# Altium PCB PCB1.PcbDoc (part 1 of 2)
Units mm, origin at the board's own origin, x right, y up, seen from the top; angles counter-clockwise.
Board outline 123 x 45 mm, 2 copper layers (Top Layer, Bottom Layer); 147 components, 132 nets, 546 pads, 235 vias.
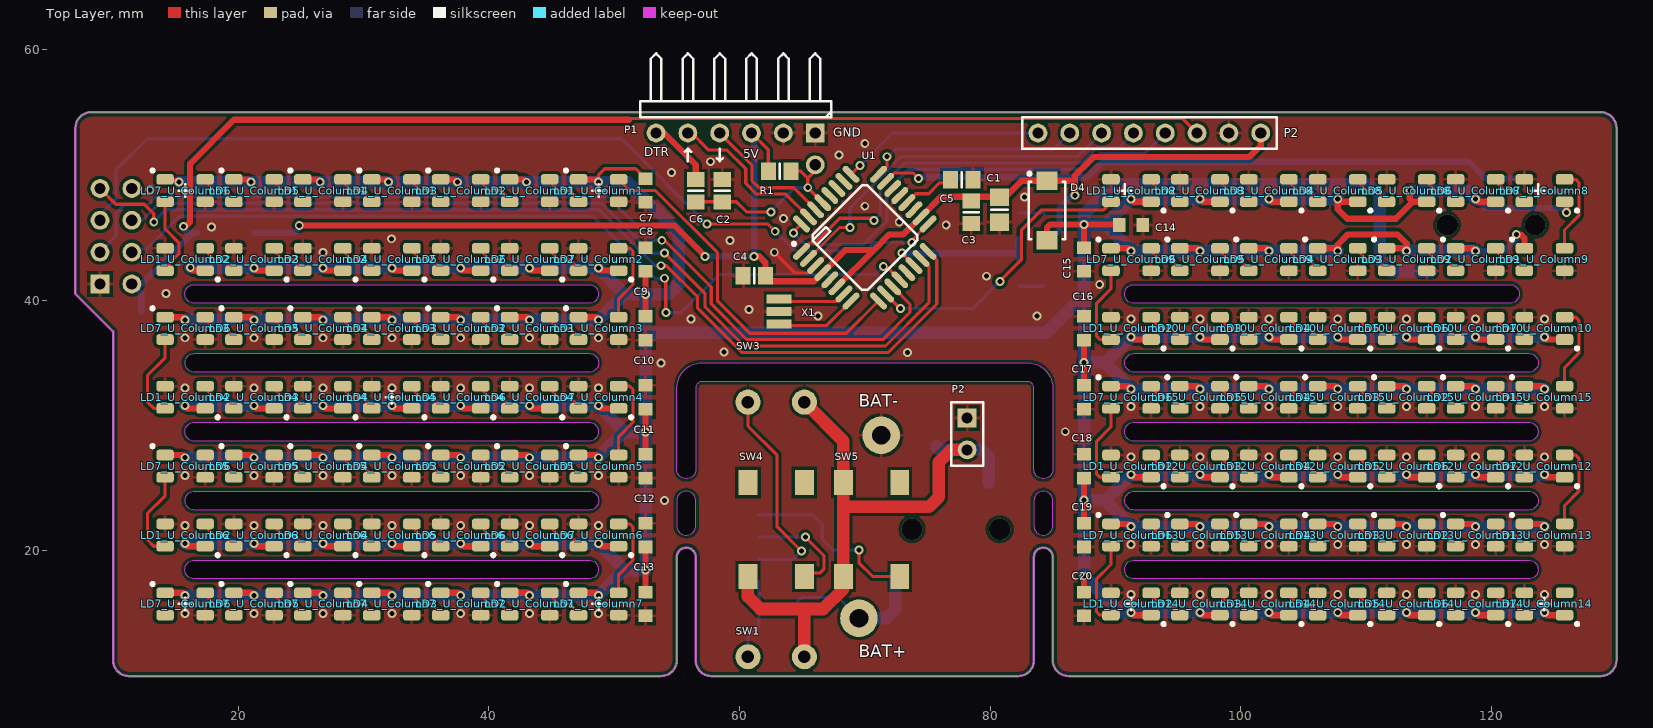
[diagram p0: Top Layer view]
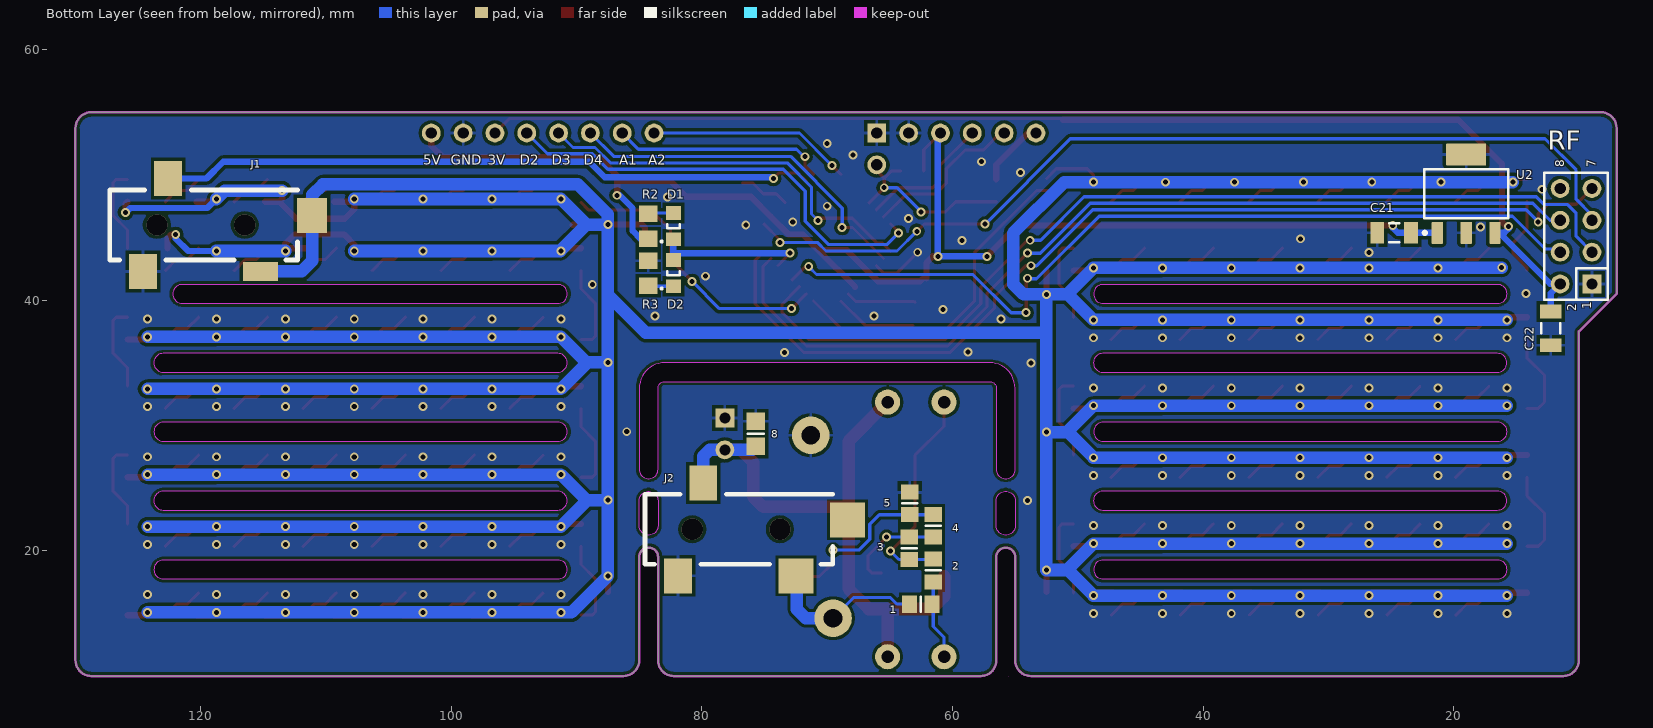
[diagram p1: Bottom Layer view, seen from below]
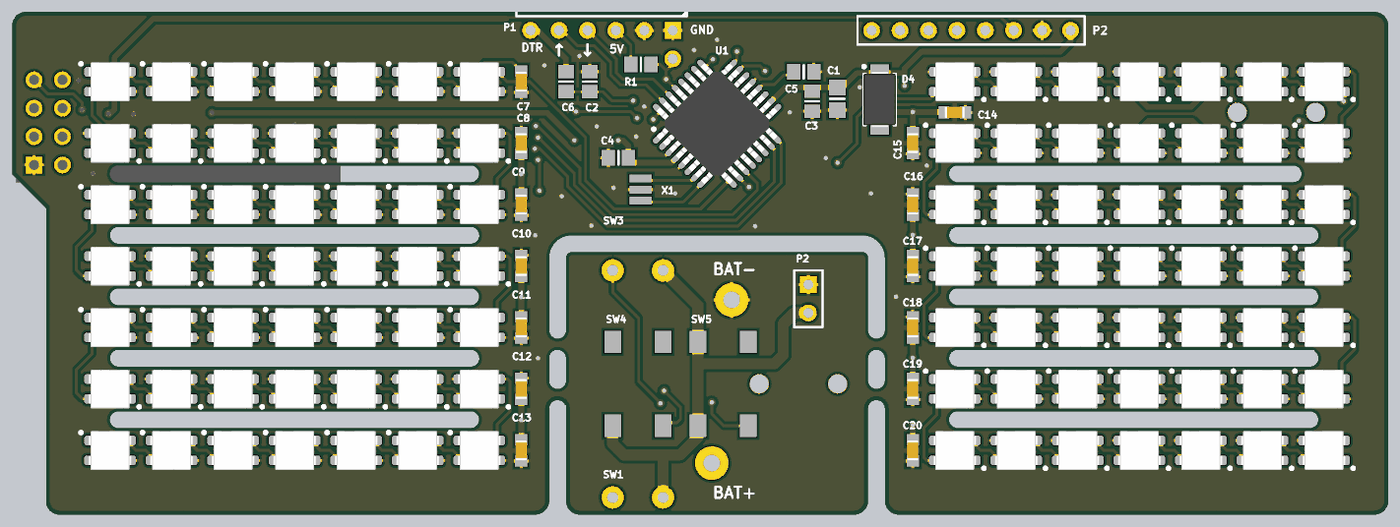
[diagram p3: 3D render of the assembled board from above, using the file's embedded part models]

## Layer stack, top to bottom
Top Solder: solder mask 0.0102, Solder Resist, Dk 3.5
Top Layer: signal copper 0.0356
Dielectric 1: dielectric 0.32, FR-4, Dk 4.8
Bottom Layer: signal copper 0.0356
Bottom Solder: solder mask 0.0102, Solder Resist, Dk 3.5

## Board outline
11.27,10 53.73,10 ccw(c53.73,11.27) 55,11.27 55,19.5 cw(c55.75,19.5) 55.75,20.25 cw(c55.75,19.5) 56.5,19.5 56.5,11.25 ccw(c57.75,11.25) 57.75,10 82.25,10 ccw(c82.25,11.25) 83.5,11.25 83.5,19.5 cw(c84.25,19.5) 84.25,20.25 cw(c84.25,19.5) 85,19.5 85,11.27 ccw(c86.27,11.27) 86.27,10 128.73,10 ccw(c128.73,11.27) 130,11.27 130,53.73 ccw(c128.73,53.73) 128.73,55 8.25,55 ccw(c8.25,53.75) 7,53.75 7,40.5 10,37.5 10,11.27 ccw(c11.27,11.27)
cut-out: 83.5,22 ccw(c84.25,22) 85,22 85,24 ccw(c84.25,24) 83.5,24
cut-out: 55,26.5 55,32.98 cw(c57.02,32.98) 57.02,35 82.98,35 cw(c82.98,32.98) 85,32.98 85,26.5 cw(c84.25,26.5) 83.5,26.5 83.5,32.98 ccw(c82.98,32.98) 82.98,33.5 57.02,33.5 ccw(c57.02,32.98) 56.5,32.98 56.5,26.5 cw(c55.75,26.5)
cut-out: 55,22 ccw(c55.75,22) 56.5,22 56.5,24 ccw(c55.75,24) 55,24
cut-out: 15.736,40.5 cw(c16.486,40.5) 16.486,41.25 47.986,41.25 cw(c47.986,40.5) 48.736,40.5 cw(c47.986,40.5) 47.986,39.75 16.486,39.75 cw(c16.486,40.5)
cut-out: 15.736,29.5 cw(c16.486,29.5) 16.486,30.25 47.986,30.25 cw(c47.986,29.5) 48.736,29.5 cw(c47.986,29.5) 47.986,28.75 16.486,28.75 cw(c16.486,29.5)
cut-out: 15.75,35 cw(c16.5,35) 16.5,35.75 48,35.75 cw(c48,35) 48.75,35 cw(c48,35) 48,34.25 16.5,34.25 cw(c16.5,35)
cut-out: 15.736,18.5 cw(c16.486,18.5) 16.486,19.25 47.986,19.25 cw(c47.986,18.5) 48.736,18.5 cw(c47.986,18.5) 47.986,17.75 16.486,17.75 cw(c16.486,18.5)
cut-out: 15.75,24 cw(c16.5,24) 16.5,24.75 48,24.75 cw(c48,24) 48.75,24 cw(c48,24) 48,23.25 16.5,23.25 cw(c16.5,24)
cut-out: 90.75,24 cw(c91.5,24) 91.5,24.75 123,24.75 cw(c123,24) 123.75,24 cw(c123,24) 123,23.25 91.5,23.25 cw(c91.5,24)
cut-out: 90.736,18.5 cw(c91.486,18.5) 91.486,19.25 122.986,19.25 cw(c122.986,18.5) 123.736,18.5 cw(c122.986,18.5) 122.986,17.75 91.486,17.75 cw(c91.486,18.5)
cut-out: 90.75,35 cw(c91.5,35) 91.5,35.75 123,35.75 cw(c123,35) 123.75,35 cw(c123,35) 123,34.25 91.5,34.25 cw(c91.5,35)
cut-out: 90.736,29.5 cw(c91.486,29.5) 91.486,30.25 122.986,30.25 cw(c122.986,29.5) 123.736,29.5 cw(c122.986,29.5) 122.986,28.75 91.486,28.75 cw(c91.486,29.5)
cut-out: 90.736,40.5 cw(c91.486,40.5) 91.486,41.25 121.486,41.25 cw(c121.486,40.5) 122.236,40.5 cw(c121.486,40.5) 121.486,39.75 91.486,39.75 cw(c91.486,40.5)
cut-out: 55.5,10

## Design rules (kind name [scope] priority, off if disabled: settings)
BoardOutlineClearance [All] p1: gap=0.254 ignorepadtopadclearanceinfootprint=FALSE except(0: Arc-SplitContinuation Track-SplitContinuation SMDPad-SplitContinuation THPad-SplitContinuation Via-SplitContinuation Fill-SplitContinuation Poly-SplitContinuation Region-SplitContinuation Text-SplitContinuation)
Clearance [All] p1: gap=0.254 ignorepadtopadclearanceinfootprint=FALSE except(0: Arc-Hole Track-Hole SMDPad-Hole THPad-Hole Via-Hole Fill-Hole Poly-Hole Region-Hole Text-Hole)
HoleSize [All] p1: absolutevalues=TRUE maxlimit=2.54 minlimit=0.2 maxpercent=80.000 minpercent=20.000
MinimumAnnularRing [All] p1: minimumring=0.076
MinimumSolderMaskSliver [All] p1: minsoldermaskwidth=0.096
PlaneConnect [All] p1: pad.planeconnectstyle=Relief pad.reliefexpansion=0.508 pad.reliefentries=4 pad.reliefconductorwidth=0.254 pad.reliefairgap=0.254 via.planeconnectstyle=Direct via.reliefexpansion=0.508 via.reliefentries=4 via.reliefconductorwidth=0.254 via.reliefairgap=0.254
PolygonConnect [All] p1: thpad.connectstyle=Relief thpad.reliefconductorwidth=0.254 thpad.reliefentries=4 thpad.polygonreliefangle="90 Angle" thpad.airgapwidth=0.254 smdpad.connectstyle=Relief smdpad.reliefconductorwidth=0.254 smdpad.reliefentries=4 smdpad.polygonreliefangle="90 Angle" smdpad.airgapwidth=0.254 via.connectstyle=Direct via.reliefconductorwidth=0.254 via.reliefentries=4 via.polygonreliefangle="90 Angle" via.airgapwidth=0.254
RoomDefinition U_Column15 [InComponentClass('U_Column15')] p1: confinementstyle=ConfineIn formatcopy=TRUE lockcomponents=FALSE outline 88.25,29.5 127.25,29.5 127.25,35 88.25,35
RoomDefinition U_Column14 [InComponentClass('U_Column14')] p2: confinementstyle=ConfineIn formatcopy=TRUE lockcomponents=FALSE outline 127.25,18.5 88.25,18.5 88.25,13 127.25,13
RoomDefinition U_Column13 [InComponentClass('U_Column13')] p3: confinementstyle=ConfineIn formatcopy=TRUE lockcomponents=FALSE outline 88.25,18.5 127.25,18.5 127.25,24 88.25,24
RoomDefinition U_Column12 [InComponentClass('U_Column12')] p4: confinementstyle=ConfineIn formatcopy=TRUE lockcomponents=FALSE outline 127.25,29.5 88.25,29.5 88.25,24 127.25,24
RoomDefinition U_Column10 [InComponentClass('U_Column10')] p5: confinementstyle=ConfineIn formatcopy=TRUE lockcomponents=FALSE outline 127.25,40.5 88.25,40.5 88.25,35 127.25,35
RoomDefinition U_Column9 [InComponentClass('U_Column9')] p6: confinementstyle=ConfineIn formatcopy=TRUE lockcomponents=FALSE outline 88.25,40.5 127.25,40.5 127.25,46 88.25,46
RoomDefinition U_Column8 [InComponentClass('U_Column8')] p7: confinementstyle=ConfineIn formatcopy=TRUE lockcomponents=FALSE outline 127.25,51.5 88.25,51.5 88.25,46 127.25,46
RoomDefinition U_Column1 [InComponentClass('U_Column1')] p8: confinementstyle=ConfineIn formatcopy=TRUE lockcomponents=FALSE outline 12.75,46 51.75,46 51.75,51.5 12.75,51.5
RoomDefinition U_Column2 [InComponentClass('U_Column2')] p9: confinementstyle=ConfineIn formatcopy=TRUE lockcomponents=FALSE outline 51.75,46 12.75,46 12.75,40.5 51.75,40.5
RoomDefinition U_Column3 [InComponentClass('U_Column3')] p10: confinementstyle=ConfineIn formatcopy=TRUE lockcomponents=FALSE outline 12.75,35 51.75,35 51.75,40.5 12.75,40.5
RoomDefinition U_Column4 [InComponentClass('U_Column4')] p11: confinementstyle=ConfineIn formatcopy=TRUE lockcomponents=FALSE outline 12.75,29.5 51.75,29.5 51.75,35 12.75,35
RoomDefinition U_Column7 [InComponentClass('U_Column7')] p12: confinementstyle=ConfineIn formatcopy=TRUE lockcomponents=FALSE outline 12.75,13 51.75,13 51.75,18.5 12.75,18.5
RoomDefinition U_Column6 [InComponentClass('U_Column6')] p13: confinementstyle=ConfineIn formatcopy=TRUE lockcomponents=FALSE outline 51.75,24 12.75,24 12.75,18.5 51.75,18.5
RoomDefinition U_Column5 [InComponentClass('U_Column5')] p14: confinementstyle=ConfineIn formatcopy=TRUE lockcomponents=FALSE outline 12.75,24 51.75,24 51.75,29.5 12.75,29.5
RoutingVias [All] p1: holewidth=0.4 width=0.711 viastyle="Through Hole" minholewidth=0.4 minwidth=0.711 maxholewidth=0.711 maxwidth=1.27
SilkToSilkClearance [All] p1: silktosilkclearance=0.1
SilkToSolderMaskClearance [IsPad] p1: minsilkscreentomaskgap=0.1 clearancetoexposedcopper=TRUE
SolderMaskExpansion [All] p1: expansion=0.102
Width [All] p1: maxlimit=1 minlimit=0.254 preferedwidth=0.5
25 further rules are at their usual default settings.

## Classes and differential pairs
component class U_Column15: LD1_U_Column15 LD2_U_Column15 LD3_U_Column15 LD4_U_Column15 LD5_U_Column15 LD6_U_Column15 LD7_U_Column15
component class U_Column14: LD1_U_Column14 LD2_U_Column14 LD3_U_Column14 LD4_U_Column14 LD5_U_Column14 LD6_U_Column14 LD7_U_Column14
component class U_Column13: LD1_U_Column13 LD2_U_Column13 LD3_U_Column13 LD4_U_Column13 LD5_U_Column13 LD6_U_Column13 LD7_U_Column13
component class U_Column10: LD1_U_Column10 LD2_U_Column10 LD3_U_Column10 LD4_U_Column10 LD5_U_Column10 LD6_U_Column10 LD7_U_Column10
component class U_Column9: LD1_U_Column9 LD2_U_Column9 LD3_U_Column9 LD4_U_Column9 LD5_U_Column9 LD6_U_Column9 LD7_U_Column9
component class U_Column8: LD1_U_Column8 LD2_U_Column8 LD3_U_Column8 LD4_U_Column8 LD5_U_Column8 LD6_U_Column8 LD7_U_Column8
component class U_Column7: LD1_U_Column7 LD2_U_Column7 LD3_U_Column7 LD4_U_Column7 LD5_U_Column7 LD6_U_Column7 LD7_U_Column7
component class U_Column6: LD1_U_Column6 LD2_U_Column6 LD3_U_Column6 LD4_U_Column6 LD5_U_Column6 LD6_U_Column6 LD7_U_Column6
component class U_Column5: LD1_U_Column5 LD2_U_Column5 LD3_U_Column5 LD4_U_Column5 LD5_U_Column5 LD6_U_Column5 LD7_U_Column5
component class U_Column4: LD1_U_Column4 LD2_U_Column4 LD3_U_Column4 LD4_U_Column4 LD5_U_Column4 LD6_U_Column4 LD7_U_Column4
component class U_Column3: LD1_U_Column3 LD2_U_Column3 LD3_U_Column3 LD4_U_Column3 LD5_U_Column3 LD6_U_Column3 LD7_U_Column3
component class U_Column2: LD1_U_Column2 LD2_U_Column2 LD3_U_Column2 LD4_U_Column2 LD5_U_Column2 LD6_U_Column2 LD7_U_Column2
component class U_Column1: LD1_U_Column1 LD2_U_Column1 LD3_U_Column1 LD4_U_Column1 LD5_U_Column1 LD6_U_Column1 LD7_U_Column1
component class U_serpentine2: C14 C15 C16 C17 C18 C19 C20
component class U_Column12: LD1_U_Column12 LD2_U_Column12 LD3_U_Column12 LD4_U_Column12 LD5_U_Column12 LD6_U_Column12 LD7_U_Column12
channel class Column: U_Column21 U_Column31 U_Column41 U_Column51 U_Column61 U_Column71 U_Columnelva
component class U_serpentine: C7 C7_U_serpentine C8 C8_U_serpentine C9 C9_U_serpentine C10 C10_U_serpentine C11 C11_U_serpentine C12 C12_U_serpentine C13 C13_U_serpentine
component class U_Controller: 1 2 3 4 5 8 BAT+ BAT- J2 P2 SW1 SW3 SW4 SW5
component class main: C1 C2 C3 C4 C5 C6 C21 C22 D1 D2 D4 J1 P1 P2 R1 R2 R3 RF U1 U2 X1

## Components (designator, comment, footprint, x,y, rotation, side; value= is the part's Value field where it differs from the comment)
1 "Res1" 6-0805_N 62.534,15.746 r0 bottom value=1K
2 "Res1" 6-0805_N 61.529,18.424 r270 bottom value=1K
3 "Res1" 6-0805_N 63.434,20.202 r270 bottom value=1K
4 "Res1" 6-0805_N 61.551,22.002 r270 bottom value=1K
5 "Res1" 6-0805_N 63.412,23.78 r270 bottom value=1K
8 "Res1" 6-0805_M 75.7,29.328 r90 bottom value=1M
BAT+ "kabelhål" "kabelhål USB" 69.53,14.614 r90 top
BAT- "kabelhål" "kabelhål USB" 71.308,29.219 r90 top
C1 "Cap" 6-0805_M 80.75,47.217 r270 top value=1uF
C2 "Cap" 6-0805_N 58.63,48.75 r270 top value=1nF
C3 "Cap" 6-0805_N 78.5,47.006 r270 top value=10uF
C4 "Cap" 6-0805_N 61.189,41.935 r180 top value=100nF
C5 "Cap" 6-0805_N 77.75,49.622 r0 top value=100nF
C6 "Cap" 6-0805_N 56.5,48.75 r90 top value=100nF
C7 "1uF" CAP0603 52.5,48.75 r90 top value=1µF
C8 "1uF" CAP0603 52.5,43.25 r270 top value=1µF
C9 "1uF" CAP0603 52.5,37.75 r90 top value=1µF
C10 "1uF" CAP0603 52.5,32.25 r270 top value=1µF
C11 "1uF" CAP0603 52.5,26.75 r90 top value=1µF
C12 "1uF" CAP0603 52.5,21.25 r270 top value=1µF
C13 "1uF" CAP0603 52.5,15.75 r90 top value=1µF
C14 "1uF" CAP0603 91.25,46 r180 top value=1µF
C15 "1uF" CAP0603 87.5,43.25 r90 top value=1µF
C16 "1uF" CAP0603 87.5,37.75 r270 top value=1µF
C17 "1uF" CAP0603 87.5,32.25 r90 top value=1µF
C18 "1uF" CAP0603 87.5,26.75 r270 top value=1µF
C19 "1uF" CAP0603 87.5,21.25 r90 top value=1µF
C20 "1uF" CAP0603 87.5,15.75 r90 top value=1µF
C21 "Cap Semi" C1206 24.75,45.375 r180 bottom value=0.47uF
C22 "Cap Semi" C1206 12.25,37.75 r90 bottom value=33uF
D1 "LED green" LED0805 82.278,45.904 r0 bottom
D2 "LED red" LED0805 82.278,42.154 r0 bottom
D4 "STPS1L40A" "schottky smd" 84.54,47.15 r90 top
J1 "3.5mm Jack" PHONEJACK 123.5,46 r180 bottom
J2 "3.5mm Jack" Phonejack 80.78,21.708 r180 bottom locked
LD1_U_Column1 "WS2812B-Mini" WS2812B-Mini 48.75,48.75 r0 top (schematic designator LD1)
LD1_U_Column2 "WS2812B-Mini" WS2812B-Mini 15.75,43.25 r180 top (schematic designator LD1)
LD1_U_Column3 "WS2812B-Mini" WS2812B-Mini 48.75,37.75 r0 top (schematic designator LD1)
LD1_U_Column4 "WS2812B-Mini" WS2812B-Mini 15.75,32.25 r180 top (schematic designator LD1)
LD1_U_Column5 "WS2812B-Mini" WS2812B-Mini 48.75,26.75 r0 top (schematic designator LD1)
LD1_U_Column6 "WS2812B-Mini" WS2812B-Mini 15.75,21.25 r180 top (schematic designator LD1)
LD1_U_Column7 "WS2812B-Mini" WS2812B-Mini 48.75,15.75 r0 top (schematic designator LD1)
LD1_U_Column8 "WS2812B-Mini" WS2812B-Mini 91.25,48.75 r180 top (schematic designator LD1)
LD1_U_Column9 "WS2812B-Mini" WS2812B-Mini 124.25,43.25 r0 top (schematic designator LD1)
LD1_U_Column10 "WS2812B-Mini" WS2812B-Mini 91.25,37.75 r180 top (schematic designator LD1)
LD1_U_Column12 "WS2812B-Mini" WS2812B-Mini 91.25,26.75 r180 top (schematic designator LD1)
LD1_U_Column13 "WS2812B-Mini" WS2812B-Mini 124.25,21.25 r0 top (schematic designator LD1)
LD1_U_Column14 "WS2812B-Mini" WS2812B-Mini 91.25,15.75 r180 top (schematic designator LD1)
LD1_U_Column15 "WS2812B-Mini" WS2812B-Mini 124.25,32.25 r0 top (schematic designator LD1)
LD2_U_Column1 "WS2812B-Mini" WS2812B-Mini 43.25,48.75 r0 top (schematic designator LD2)
LD2_U_Column2 "WS2812B-Mini" WS2812B-Mini 21.25,43.25 r180 top (schematic designator LD2)
LD2_U_Column3 "WS2812B-Mini" WS2812B-Mini 43.25,37.75 r0 top (schematic designator LD2)
LD2_U_Column4 "WS2812B-Mini" WS2812B-Mini 21.25,32.25 r180 top (schematic designator LD2)
LD2_U_Column5 "WS2812B-Mini" WS2812B-Mini 43.25,26.75 r0 top (schematic designator LD2)
LD2_U_Column6 "WS2812B-Mini" WS2812B-Mini 21.25,21.25 r180 top (schematic designator LD2)
LD2_U_Column7 "WS2812B-Mini" WS2812B-Mini 43.25,15.75 r0 top (schematic designator LD2)
LD2_U_Column8 "WS2812B-Mini" WS2812B-Mini 96.75,48.75 r180 top (schematic designator LD2)
LD2_U_Column9 "WS2812B-Mini" WS2812B-Mini 118.75,43.25 r0 top (schematic designator LD2)
LD2_U_Column10 "WS2812B-Mini" WS2812B-Mini 96.75,37.75 r180 top (schematic designator LD2)
LD2_U_Column12 "WS2812B-Mini" WS2812B-Mini 96.75,26.75 r180 top (schematic designator LD2)
LD2_U_Column13 "WS2812B-Mini" WS2812B-Mini 118.75,21.25 r0 top (schematic designator LD2)
LD2_U_Column14 "WS2812B-Mini" WS2812B-Mini 96.75,15.75 r180 top (schematic designator LD2)
LD2_U_Column15 "WS2812B-Mini" WS2812B-Mini 118.75,32.25 r0 top (schematic designator LD2)
LD3_U_Column1 "WS2812B-Mini" WS2812B-Mini 37.75,48.75 r0 top (schematic designator LD3)
LD3_U_Column2 "WS2812B-Mini" WS2812B-Mini 26.75,43.25 r180 top (schematic designator LD3)
LD3_U_Column3 "WS2812B-Mini" WS2812B-Mini 37.75,37.75 r0 top (schematic designator LD3)
LD3_U_Column4 "WS2812B-Mini" WS2812B-Mini 26.75,32.25 r180 top (schematic designator LD3)
LD3_U_Column5 "WS2812B-Mini" WS2812B-Mini 37.75,26.75 r0 top (schematic designator LD3)
LD3_U_Column6 "WS2812B-Mini" WS2812B-Mini 26.75,21.25 r180 top (schematic designator LD3)
LD3_U_Column7 "WS2812B-Mini" WS2812B-Mini 37.75,15.75 r0 top (schematic designator LD3)
LD3_U_Column8 "WS2812B-Mini" WS2812B-Mini 102.25,48.75 r180 top (schematic designator LD3)
LD3_U_Column9 "WS2812B-Mini" WS2812B-Mini 113.25,43.25 r0 top (schematic designator LD3)
LD3_U_Column10 "WS2812B-Mini" WS2812B-Mini 102.25,37.75 r180 top (schematic designator LD3)
LD3_U_Column12 "WS2812B-Mini" WS2812B-Mini 102.25,26.75 r180 top (schematic designator LD3)
LD3_U_Column13 "WS2812B-Mini" WS2812B-Mini 113.25,21.25 r0 top (schematic designator LD3)
LD3_U_Column14 "WS2812B-Mini" WS2812B-Mini 102.25,15.75 r180 top (schematic designator LD3)
LD3_U_Column15 "WS2812B-Mini" WS2812B-Mini 113.25,32.25 r0 top (schematic designator LD3)
LD4_U_Column1 "WS2812B-Mini" WS2812B-Mini 32.25,48.75 r0 top (schematic designator LD4)
LD4_U_Column2 "WS2812B-Mini" WS2812B-Mini 32.25,43.25 r180 top (schematic designator LD4)
LD4_U_Column3 "WS2812B-Mini" WS2812B-Mini 32.25,37.75 r0 top (schematic designator LD4)
LD4_U_Column4 "WS2812B-Mini" WS2812B-Mini 32.25,32.25 r180 top (schematic designator LD4)
LD4_U_Column5 "WS2812B-Mini" WS2812B-Mini 32.25,26.75 r0 top (schematic designator LD4)
LD4_U_Column6 "WS2812B-Mini" WS2812B-Mini 32.25,21.25 r180 top (schematic designator LD4)
LD4_U_Column7 "WS2812B-Mini" WS2812B-Mini 32.25,15.75 r0 top (schematic designator LD4)
LD4_U_Column8 "WS2812B-Mini" WS2812B-Mini 107.75,48.75 r180 top (schematic designator LD4)
LD4_U_Column9 "WS2812B-Mini" WS2812B-Mini 107.75,43.25 r0 top (schematic designator LD4)
LD4_U_Column10 "WS2812B-Mini" WS2812B-Mini 107.75,37.75 r180 top (schematic designator LD4)
LD4_U_Column12 "WS2812B-Mini" WS2812B-Mini 107.75,26.75 r180 top (schematic designator LD4)
LD4_U_Column13 "WS2812B-Mini" WS2812B-Mini 107.75,21.25 r0 top (schematic designator LD4)
LD4_U_Column14 "WS2812B-Mini" WS2812B-Mini 107.75,15.75 r180 top (schematic designator LD4)
LD4_U_Column15 "WS2812B-Mini" WS2812B-Mini 107.75,32.25 r0 top (schematic designator LD4)
LD5_U_Column1 "WS2812B-Mini" WS2812B-Mini 26.75,48.75 r0 top (schematic designator LD5)
LD5_U_Column2 "WS2812B-Mini" WS2812B-Mini 37.75,43.25 r180 top (schematic designator LD5)
LD5_U_Column3 "WS2812B-Mini" WS2812B-Mini 26.75,37.75 r0 top (schematic designator LD5)
LD5_U_Column4 "WS2812B-Mini" WS2812B-Mini 37.75,32.25 r180 top (schematic designator LD5)
LD5_U_Column5 "WS2812B-Mini" WS2812B-Mini 26.75,26.75 r0 top (schematic designator LD5)
LD5_U_Column6 "WS2812B-Mini" WS2812B-Mini 37.75,21.25 r180 top (schematic designator LD5)
LD5_U_Column7 "WS2812B-Mini" WS2812B-Mini 26.75,15.75 r0 top (schematic designator LD5)
LD5_U_Column8 "WS2812B-Mini" WS2812B-Mini 113.25,48.75 r180 top (schematic designator LD5)
LD5_U_Column9 "WS2812B-Mini" WS2812B-Mini 102.25,43.25 r0 top (schematic designator LD5)
LD5_U_Column10 "WS2812B-Mini" WS2812B-Mini 113.25,37.75 r180 top (schematic designator LD5)
LD5_U_Column12 "WS2812B-Mini" WS2812B-Mini 113.25,26.75 r180 top (schematic designator LD5)
LD5_U_Column13 "WS2812B-Mini" WS2812B-Mini 102.25,21.25 r0 top (schematic designator LD5)
LD5_U_Column14 "WS2812B-Mini" WS2812B-Mini 113.25,15.75 r180 top (schematic designator LD5)
LD5_U_Column15 "WS2812B-Mini" WS2812B-Mini 102.25,32.25 r0 top (schematic designator LD5)
LD6_U_Column1 "WS2812B-Mini" WS2812B-Mini 21.25,48.75 r0 top (schematic designator LD6)
LD6_U_Column2 "WS2812B-Mini" WS2812B-Mini 43.25,43.25 r180 top (schematic designator LD6)
LD6_U_Column3 "WS2812B-Mini" WS2812B-Mini 21.25,37.75 r0 top (schematic designator LD6)
LD6_U_Column4 "WS2812B-Mini" WS2812B-Mini 43.25,32.25 r180 top (schematic designator LD6)
LD6_U_Column5 "WS2812B-Mini" WS2812B-Mini 21.25,26.75 r0 top (schematic designator LD6)
LD6_U_Column6 "WS2812B-Mini" WS2812B-Mini 43.25,21.25 r180 top (schematic designator LD6)
LD6_U_Column7 "WS2812B-Mini" WS2812B-Mini 21.25,15.75 r0 top (schematic designator LD6)
LD6_U_Column8 "WS2812B-Mini" WS2812B-Mini 118.75,48.75 r180 top (schematic designator LD6)
LD6_U_Column9 "WS2812B-Mini" WS2812B-Mini 96.75,43.25 r0 top (schematic designator LD6)
LD6_U_Column10 "WS2812B-Mini" WS2812B-Mini 118.75,37.75 r180 top (schematic designator LD6)
LD6_U_Column12 "WS2812B-Mini" WS2812B-Mini 118.75,26.75 r180 top (schematic designator LD6)
LD6_U_Column13 "WS2812B-Mini" WS2812B-Mini 96.75,21.25 r0 top (schematic designator LD6)
LD6_U_Column14 "WS2812B-Mini" WS2812B-Mini 118.75,15.75 r180 top (schematic designator LD6)
LD6_U_Column15 "WS2812B-Mini" WS2812B-Mini 96.75,32.25 r0 top (schematic designator LD6)
LD7_U_Column1 "WS2812B-Mini" WS2812B-Mini 15.75,48.75 r0 top (schematic designator LD7)
LD7_U_Column2 "WS2812B-Mini" WS2812B-Mini 48.75,43.25 r180 top (schematic designator LD7)
LD7_U_Column3 "WS2812B-Mini" WS2812B-Mini 15.75,37.75 r0 top (schematic designator LD7)
LD7_U_Column4 "WS2812B-Mini" WS2812B-Mini 48.75,32.25 r180 top (schematic designator LD7)
LD7_U_Column5 "WS2812B-Mini" WS2812B-Mini 15.75,26.75 r0 top (schematic designator LD7)
LD7_U_Column6 "WS2812B-Mini" WS2812B-Mini 48.75,21.25 r180 top (schematic designator LD7)
LD7_U_Column7 "WS2812B-Mini" WS2812B-Mini 15.75,15.75 r0 top (schematic designator LD7)
LD7_U_Column8 "WS2812B-Mini" WS2812B-Mini 124.25,48.75 r180 top (schematic designator LD7)
LD7_U_Column9 "WS2812B-Mini" WS2812B-Mini 91.25,43.25 r0 top (schematic designator LD7)
LD7_U_Column10 "WS2812B-Mini" WS2812B-Mini 124.25,37.75 r180 top (schematic designator LD7)
LD7_U_Column12 "WS2812B-Mini" WS2812B-Mini 124.25,26.75 r180 top (schematic designator LD7)
LD7_U_Column13 "WS2812B-Mini" WS2812B-Mini 91.25,21.25 r0 top (schematic designator LD7)
LD7_U_Column14 "WS2812B-Mini" WS2812B-Mini 124.25,15.75 r180 top (schematic designator LD7)
LD7_U_Column15 "WS2812B-Mini" WS2812B-Mini 91.25,32.25 r0 top (schematic designator LD7)
P1 "FTDI" HDR1X6H 66.04,53.34 r180 top
P2 "Header 8" HDR1X8 101.6,53.34 r180 top
P2 "Header 2" HDR1X2 78.166,30.59 r270 top
R1 "Res1" 6-0805_N 63.2,50.3 r180 top value=47k
R2 "1K" RES0805 84.278,45.904 r90 bottom
R3 "1K" RES0805 84.278,42.154 r90 bottom
RF "RF24L01" RF 8.96,41.294 r180 bottom locked
SW1 "Vertical switch" Btn_Vert 62.926,11.54 r0 top
SW3 "Vertical switch" Btn_Vert 62.926,31.86 r180 top
SW4 "Horizontal button" Btn_Horiz 62.926,21.7 r270 top
SW5 "Horizontal button" Btn_Horiz 70.546,21.7 r270 top
U1 "ATMEGA328P-AU" TQFP32 70,44.99 r45 top
U2 "LM340MP-5.0/NOPB" DCY0004A_N 19,48.5 r90 bottom
X1 "16MHz" osc 63.17,39.091 r270 top

## Footprints (in the part's own frame and the unit in brackets; to place one, negate y for a bottom-side part, rotate by r counter-clockwise, add the part's x,y. Pads: shape width x height; smd on the part's side, far side on the other; paste and mask are expansions set on the pad)
6-0805_M [mm] "Chip Resistor, Body 2.0x1.2mm, IPC Low Density"
  rect 1.4x1.5 smd: 1(-1,0) 2(1,0)
  silkscreen extent 0,-0.65 0,0.65, body extent -1.07,-0.7 1.07,0.7, height 0.7
6-0805_N [mm] "Chip Resistor, Body 2.0x1.2mm, IPC Medium Density"
  rect 1.2x1.4 smd: 1(-0.9,0) 2(0.9,0)
  silkscreen extent 0,-0.6 0,0.6, body extent -1.07,-0.7 1.07,0.7, height 0.7
Btn_Horiz [mm] "Horizontal 6x6mm SMD Button"
  rect 2x1.5 smd: 1(-3.75,2.25) 2(3.75,2.25) 3(-3.75,-2.25) 4(3.75,-2.25)
  body extent -4,-3 4,3, height 4.5
Btn_Vert [mm] "Vertical 6x6mm button"
  round 2 hole 1: 0(-2.25,0) 1(2.25,0)
  body extent -3,-3.5 3,0.75, height 6
C1206 [mm] "Chip Capacitor, Body 3.2x1.6mm, IPC High Density"
  rect 1.1x1.7 smd: 1(-1.35,0) 2(1.35,0)
  silkscreen extent -0.4,-0.75 0.4,0.75, body extent -1.7,-0.9 1.7,0.9, height 1.3
CAP0603 [mm]
  rect 1x1.1 smd: 1(-0.95,0) 2(0.95,0)
  body extent -0.9,-0.5 0.9,0.5, height 0.8
DCY0004A_N [mm] "SOT223, 4-Leads, Body 6.7x3.7mm, Pitch 2.3mm, IPC Medium Density"
  rrect11% 1.75x0.9 smd: 1(-3.125,2.3) 2(-3.125,0) 3(-3.125,-2.3)
  rrect6% 1.75x3.2 smd: 4(3.125,0)
  silkscreen extent -3.25,-3.35 1.95,3.43, body extent -3.5,-3.25 3.5,3.25, height 1.62
HDR1X2 [mm] "Connector; Header; 2 Position"
  rect 1.5x1.5 hole 0.9: 1(0,0)
  round 1.5 hole 0.9: 2(2.54,0)
  silkscreen extent -1.27,-1.27 3.81,1.27
HDR1X6H [mm] "Connector; Header; 6 Position; Right Angle"
  rect 1.5x1.5 hole 0.9: 1(0,0)
  round 1.5 hole 0.9: 2(2.54,0) 3(5.08,0) 4(7.62,0) 5(10.16,0) 6(12.7,0)
  silkscreen extent -1.27,-6.35 13.97,-1.27
HDR1X8 [mm] "Connector; Header; 8 Position"
  round 1.5 hole 0.9: 1(0,0) 2(2.54,0) 3(5.08,0) 4(7.62,0) 5(10.16,0) 6(12.7,0) 7(15.24,0) 8(17.78,0)
  silkscreen extent -1.27,-1.27 19.05,1.27
"kabelhål USB" [mm]
  round 3 hole 1.5: 1(0,0)
LED0805 [mm]
  rect 1.2x1.1 smd: 1(0,-1.05) 2(0,1.05)
  silkscreen extent -0.5,-0.15 0.98,1.26, body extent -0.63,-1 0.62,1, height 0.68
osc [mm]
  rrect0% 0.7x2 smd: GND(0,0) OSCI(1,0) OSCO(-1,0)
PHONEJACK [mil] "3.5mm phone jack"
  rect 88x110 smd: 1(-44,-146)
  rect 110x59.06 smd: 2(326,-146)
  rect 87x110 smd: 3(35,146)
  rect 94.49x110 smd: 4(488,30)
  silkscreen extent -148,-110 442,110, body extent -237,-167 508,166, height 200
Phonejack [mil] "3.5mm phone jack"
  rect 88x110 smd: 1(-44,-146)
  rect 110x110 smd: 2(326,-146) 4(488,30)
  rect 87x110 smd: 3(35,146)
  silkscreen extent -148,-110 442,110, body extent -237,-167 508,166, height 200
RES0805 [mm]
  rect 1.3x1.5 smd: 1(-1,0) 2(1,0)
  body extent -1.1,-0.7 1.1,0.7, height 0.6
RF [mm]
  rect 1.5x1.5 hole 0.9: 1(0,0)
  round 1.5 hole 0.9: 2(-2.54,0) 3(0,2.54) 4(-2.54,2.54) 5(0,5.08) 6(-2.54,5.08) 7(0,7.62) 8(-2.54,7.62)
  silkscreen extent -3.81,-1.27 1.27,8.89, body extent -27.4,-1.57 1.6,13.43, height 6.7
"schottky smd" [mm] "Molded Diode, 2-Leads, Body 4,28x2,58mm, IPC Low Density"
  rect 1.5x1.7 smd: 1(-2.375,0) 2(2.375,0)
  silkscreen extent -2.3,-1.45 3.07,1.52, body extent -2.52,-1.45 2.52,1.45, height 2.45
TQFP32 [mm] "CQFP, 32-Leads, Body 9,00x9,00mm, Pitch 0,80mm, IPC Low Density"
  oval 1.7x0.5 smd: 1(-4.35,2.8) 2(-4.35,2) 3(-4.35,1.2) 4(-4.35,0.4) 5(-4.35,-0.4) 6(-4.35,-1.2) 7(-4.35,-2) 8(-4.35,-2.8) 17(4.35,-2.8) 18(4.35,-2) 19(4.35,-1.2) 20(4.35,-0.4) 21(4.35,0.4) 22(4.35,1.2) 23(4.35,2) 24(4.35,2.8)
  oval 0.5x1.7 smd: 9(-2.8,-4.35) 10(-2,-4.35) 11(-1.2,-4.35) 12(-0.4,-4.35) 13(0.4,-4.35) 14(1.2,-4.35) 15(2,-4.35) 16(2.8,-4.35) 25(2.8,4.35) 26(2,4.35) 27(1.2,4.35) 28(0.4,4.35) 29(-0.4,4.35) 30(-1.2,4.35) 31(-2,4.35) 32(-2.8,4.35)
  silkscreen extent -4.47,-3.1 3.1,3.77, body extent -4.62,-4.62 4.62,4.62, height 1.15
WS2812B-Mini [mm]
  rrect50% 1.4x0.85 smd: 1(-1.6,0.89) 2(-1.6,-0.89) 3(1.6,-0.89) 4(1.6,0.89)
  silkscreen extent -2.72,1.48 -2.47,1.72, body extent -1.96,-1.74 1.96,1.74, height 1.95

## Part data
1 2 3 4 5 8 R1: "Resistor", LatestRevisionDate=17-Jul-2002, LatestRevisionNote="Re-released for DXP Platform.", PackageDescription="Axial Device, Thru-Hole; 2 Leads; 0.3 in Pin Spacing", PackageReference=AXIAL-0.3, Published=8-Jun-2000, Publisher="Altium Limited"
C1 C2 C3 C4 C5 C6: "Capacitor", LatestRevisionDate=17-Jul-2002, LatestRevisionNote="Re-released for DXP Platform.", PackageDescription="Radial Cap, Thru-Hole; 2 Leads; 0.3 in Pin Spacing", PackageReference=RAD-0.3, Published=8-Jun-2000, Publisher="Altium Limited"
C7 C8 C9 C10 C11 C12 C13 C14 C15 C16 C17 C18 C19 C20: library part CAP, Rated voltage=25V, Temperature Max=+125°C, Temperature Min=-55°C, Tolerance=10%, Order code Farnell=1288202RL, Technology=X5R
C21 C22: "Capacitor (Semiconductor SIM Model)", LatestRevisionDate=29-May-2009, LatestRevisionNote="IPC-7351 Footprint Added.", PackageDescription="Chip Capacitor", PackageReference=C1206, Published=8-Jun-2000, Publisher="Altium Limited"
D1 D2: library part "LED single"
D4: library part schottky, "STPS1L40A finns på litheel"
J1 J2: library part Phonejack
LD1_U_Column1 LD1_U_Column2 LD1_U_Column3 LD1_U_Column4 LD1_U_Column5 LD1_U_Column6 LD1_U_Column7 LD1_U_Column8 LD1_U_Column9 LD1_U_Column10 LD1_U_Column12 LD1_U_Column13 LD1_U_Column14 LD1_U_Column15 LD2_U_Column1 LD2_U_Column2 LD2_U_Column3 LD2_U_Column4 LD2_U_Column5 LD2_U_Column6 LD2_U_Column7 LD2_U_Column8 LD2_U_Column9 LD2_U_Column10 LD2_U_Column12 LD2_U_Column13 LD2_U_Column14 LD2_U_Column15 LD3_U_Column1 LD3_U_Column2 LD3_U_Column3 LD3_U_Column4 LD3_U_Column5 LD3_U_Column6 LD3_U_Column7 LD3_U_Column8 LD3_U_Column9 LD3_U_Column10 LD3_U_Column12 LD3_U_Column13 LD3_U_Column14 LD3_U_Column15 LD4_U_Column1 LD4_U_Column2 LD4_U_Column3 LD4_U_Column4 LD4_U_Column5 LD4_U_Column6 LD4_U_Column7 LD4_U_Column8 LD4_U_Column9 LD4_U_Column10 LD4_U_Column12 LD4_U_Column13 LD4_U_Column14 LD4_U_Column15 LD5_U_Column1 LD5_U_Column2 LD5_U_Column3 LD5_U_Column4 LD5_U_Column5 LD5_U_Column6 LD5_U_Column7 LD5_U_Column8 LD5_U_Column9 LD5_U_Column10 LD5_U_Column12 LD5_U_Column13 LD5_U_Column14 LD5_U_Column15 LD6_U_Column1 LD6_U_Column2 LD6_U_Column3 LD6_U_Column4 LD6_U_Column5 LD6_U_Column6 LD6_U_Column7 LD6_U_Column8 LD6_U_Column9 LD6_U_Column10 LD6_U_Column12 LD6_U_Column13 LD6_U_Column14 LD6_U_Column15 LD7_U_Column1 LD7_U_Column2 LD7_U_Column3 LD7_U_Column4 LD7_U_Column5 LD7_U_Column6 LD7_U_Column7 LD7_U_Column8 LD7_U_Column9 LD7_U_Column10 LD7_U_Column12 LD7_U_Column13 LD7_U_Column14 LD7_U_Column15: library part WS2812
P1: library part "Header 6H", "Header, 6-Pin, Right Angle", LatestRevisionDate=17-Jul-2002, LatestRevisionNote="Re-released for DXP Platform.", Publisher="Altium Limited"
P2: "Header, 8-Pin", LatestRevisionDate=17-Jul-2002, LatestRevisionNote="Re-released for DXP Platform.", Publisher="Altium Limited"
P2: "Header, 2-Pin", LatestRevisionDate=17-Jul-2002, LatestRevisionNote="Re-released for DXP Platform.", Publisher="Altium Limited"
R2 R3: library part Resistor
SW1 SW3: library part SWVERT
SW4 SW5: library part HORIZBTN
U1: library part ATmega328
U2: library part CMP-0062-01784-3, "Series 3-Terminal Positive Regulators, 4-pin SOT-223, Pb-Free", Manufacturer="Texas Instruments", PackageTopMarking=XYTT*N00A, PowerWise=N, Code_IPC=SOT223-4, Code_JEDEC=TO-261-AA, ComponentLink1Description="Datasheet URL", ComponentLink1URL=http://www.ti.com/general/docs/lit/getliterature.tsp?genericPartNumber=LM340-N&fileType=pdf, CompType="LDO IC", PackageDescription="Molded SOT-223, 6.50 x 3.56 x 1.6mm Body, 4 Lead, 2.3mm Pitch", PackageReference=DCY0004A, PinCount=4, RoHS=Y
X1: library part xtal_1, "CSTCE16M0V53-R0"

## Free pads (board coordinates)
  round 1.5 hole 0.9: 2(66.04,50.8)

## Via types
v1: diameter 0.711, hole 0.4, Top Layer to Bottom Layer, tented both sides, 231 vias
v2: diameter 1.702, hole 1.702, Top Layer to Bottom Layer, 4 vias